# Altium PCB Car_Circuitry.PcbDoc
Units mm, origin at the board's own origin, x right, y up, seen from the top; angles counter-clockwise.
Board outline 92.11 x 67.11 mm, 4 copper layers (Top Layer, PWR Plane, GND Plane, Bottom Layer), stack 1.58 mm thick; 31 components, 29 nets, 123 pads, 23 vias.
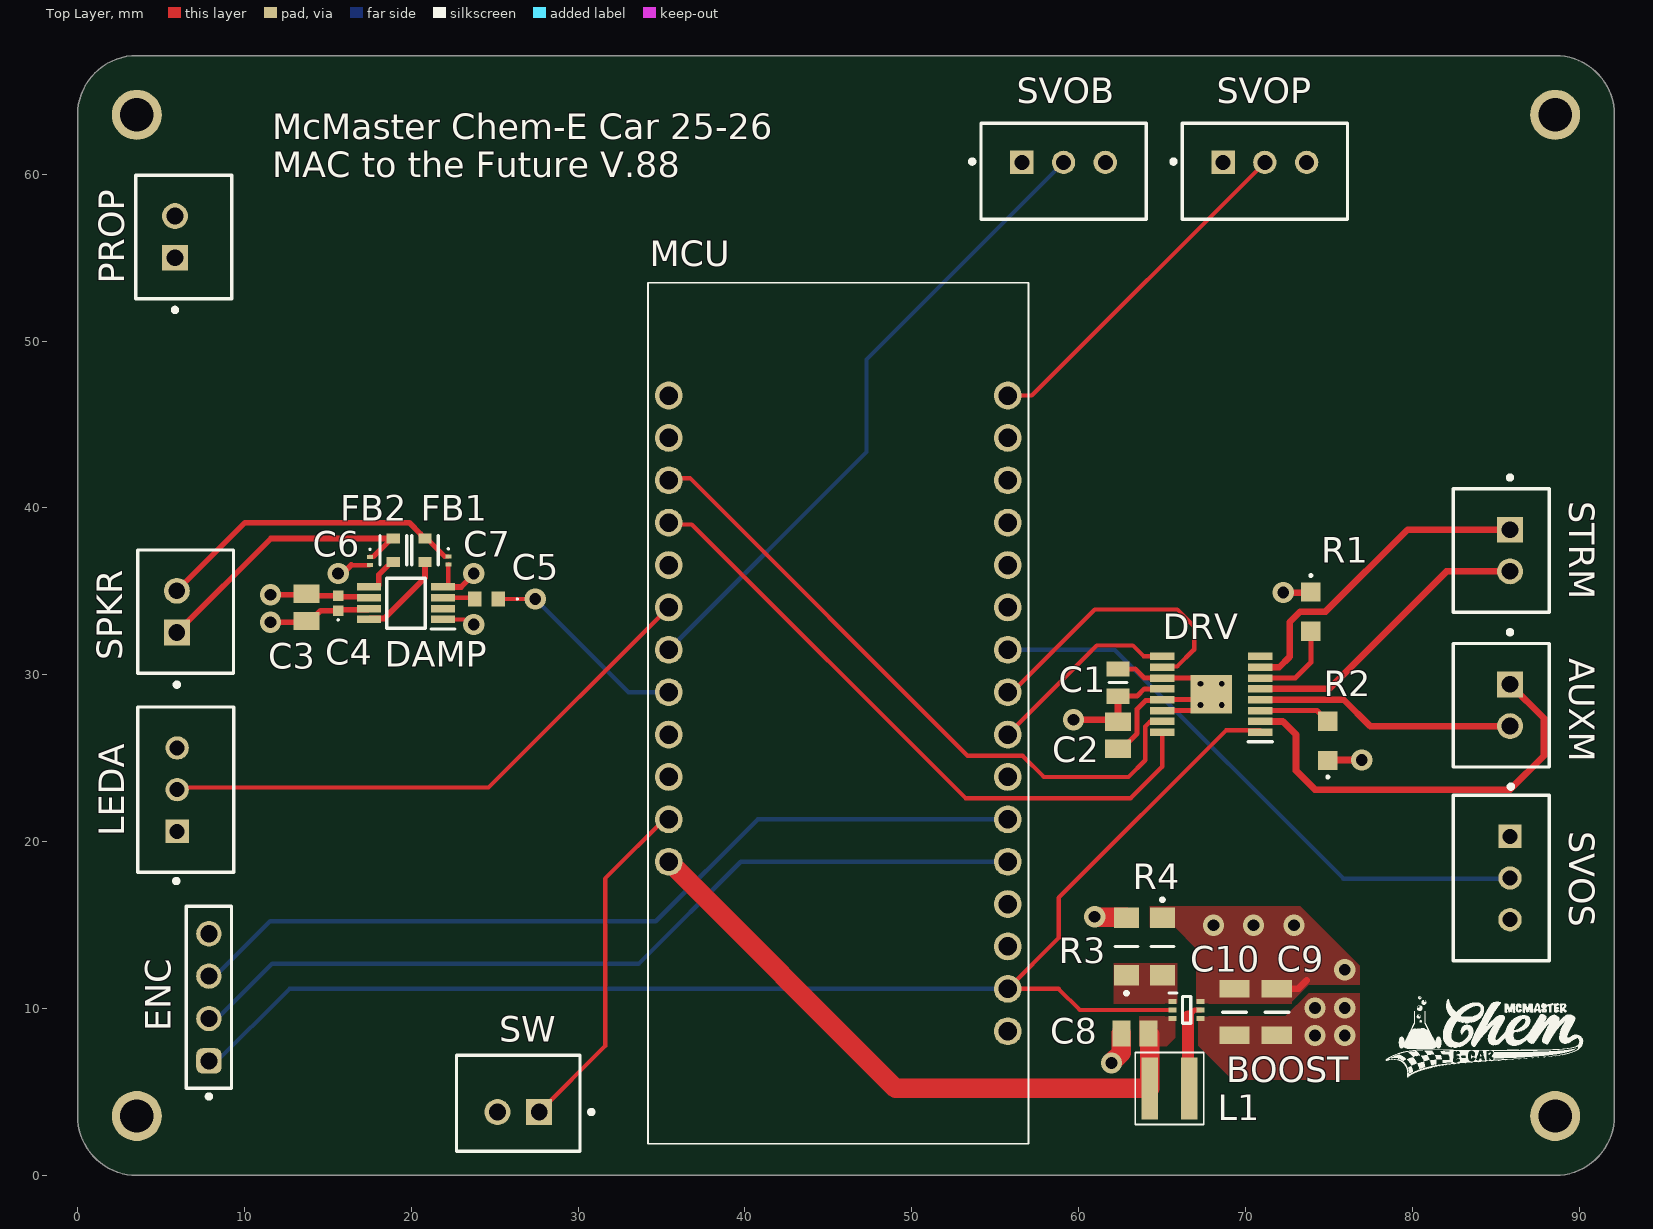
[diagram p0: Top Layer view]
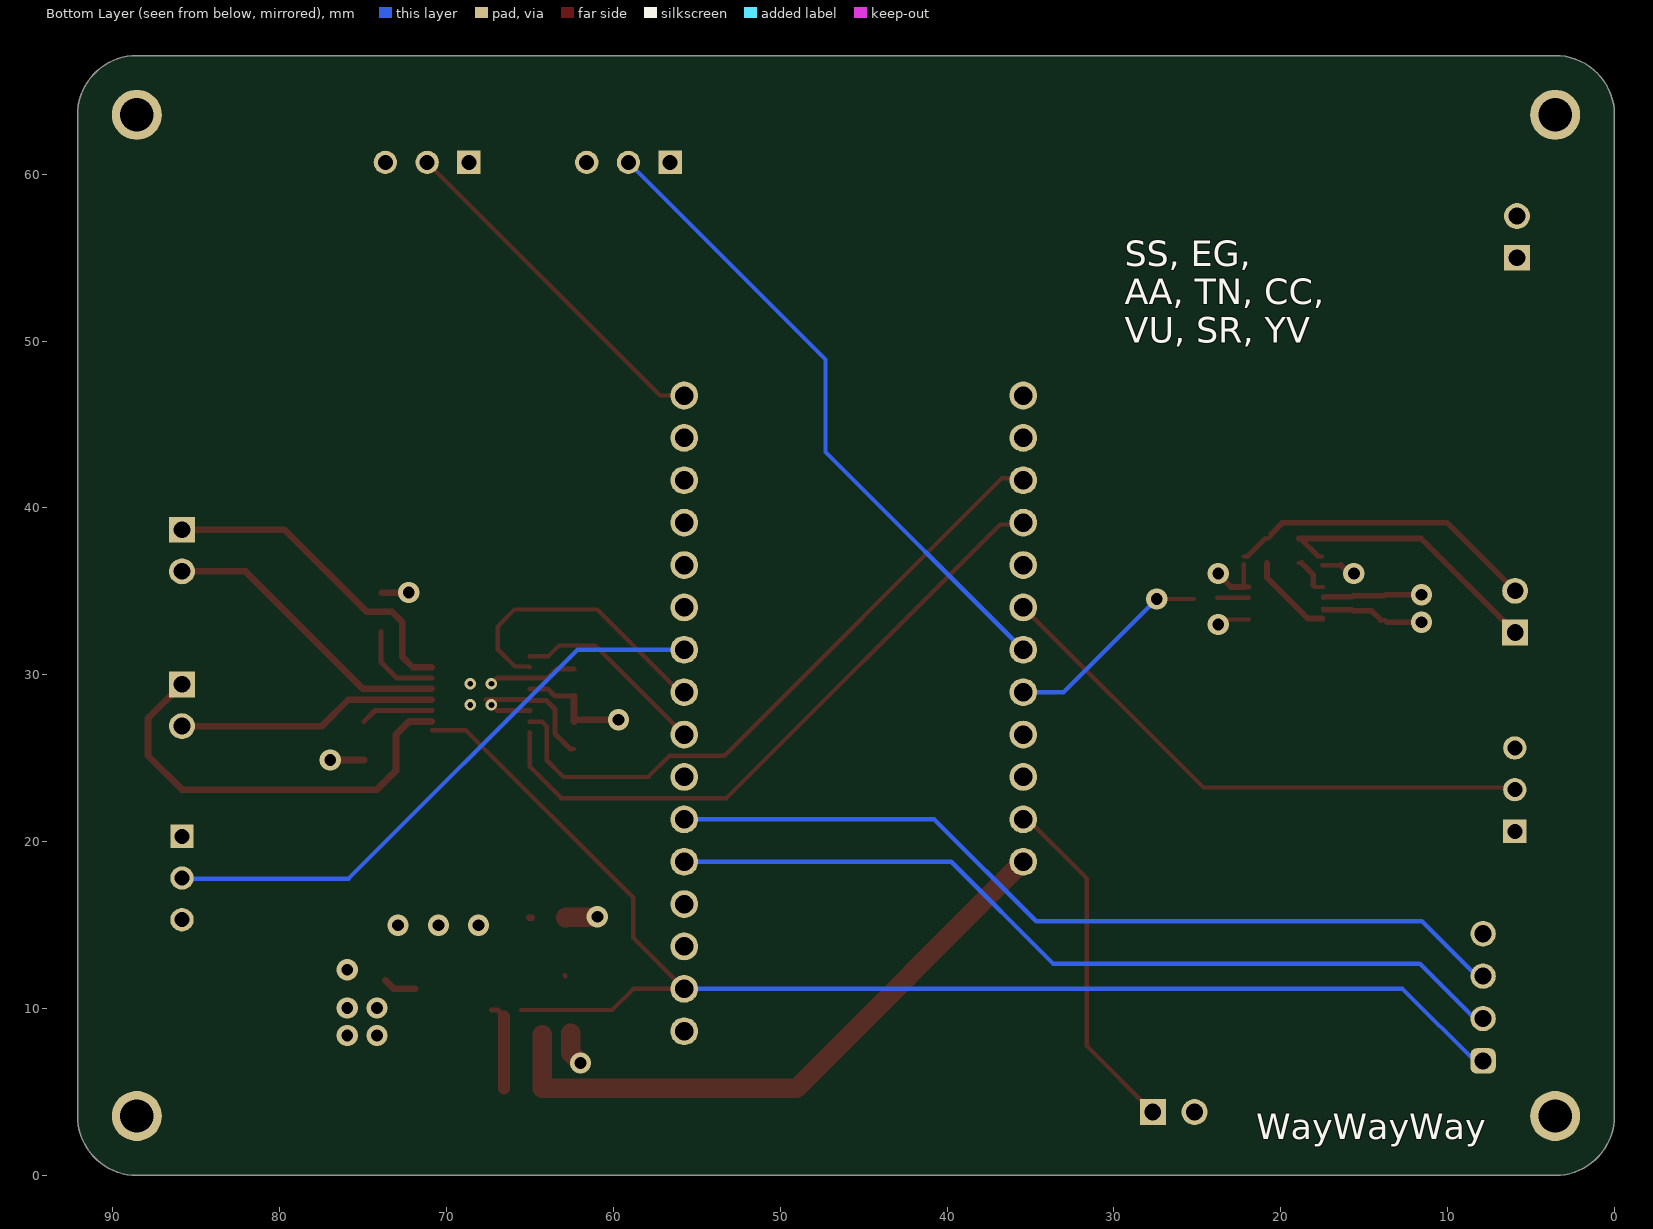
[diagram p1: Bottom Layer view, seen from below]
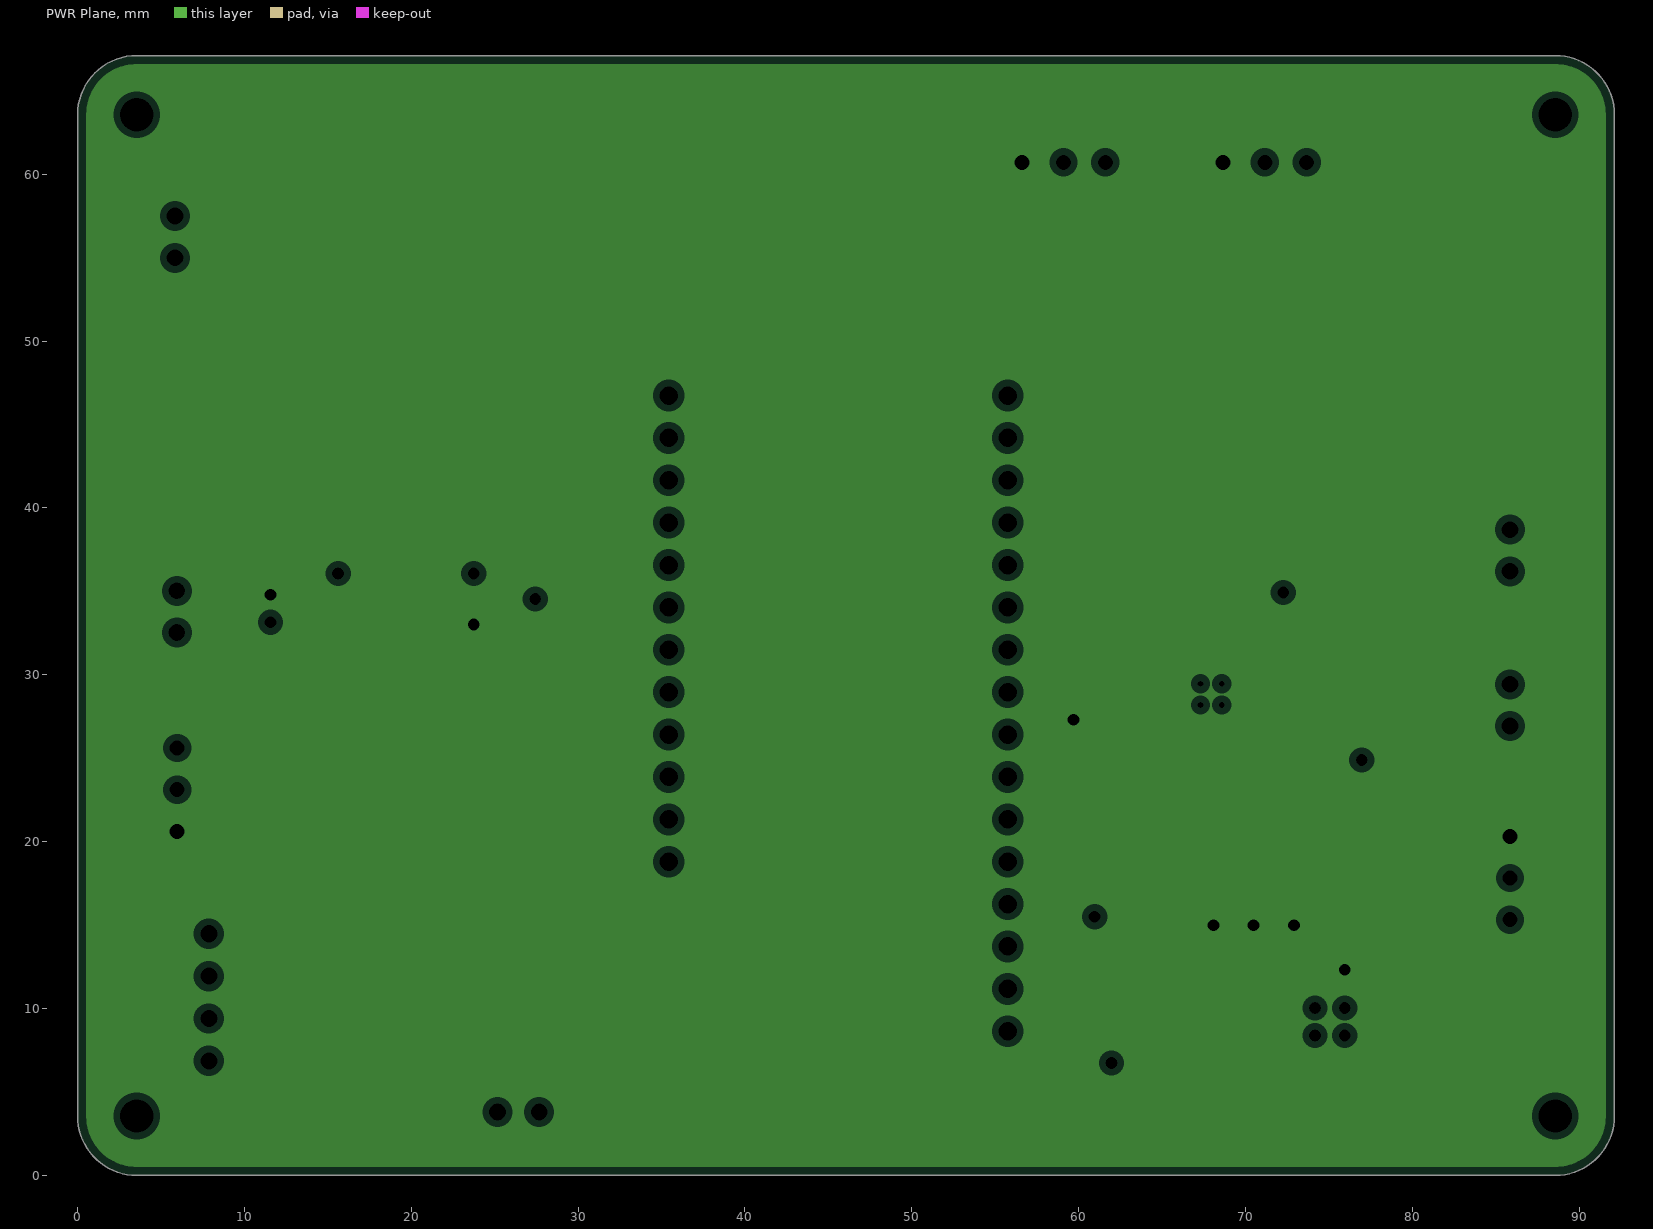
[diagram p2: PWR Plane, clearances drawn from the general rule]
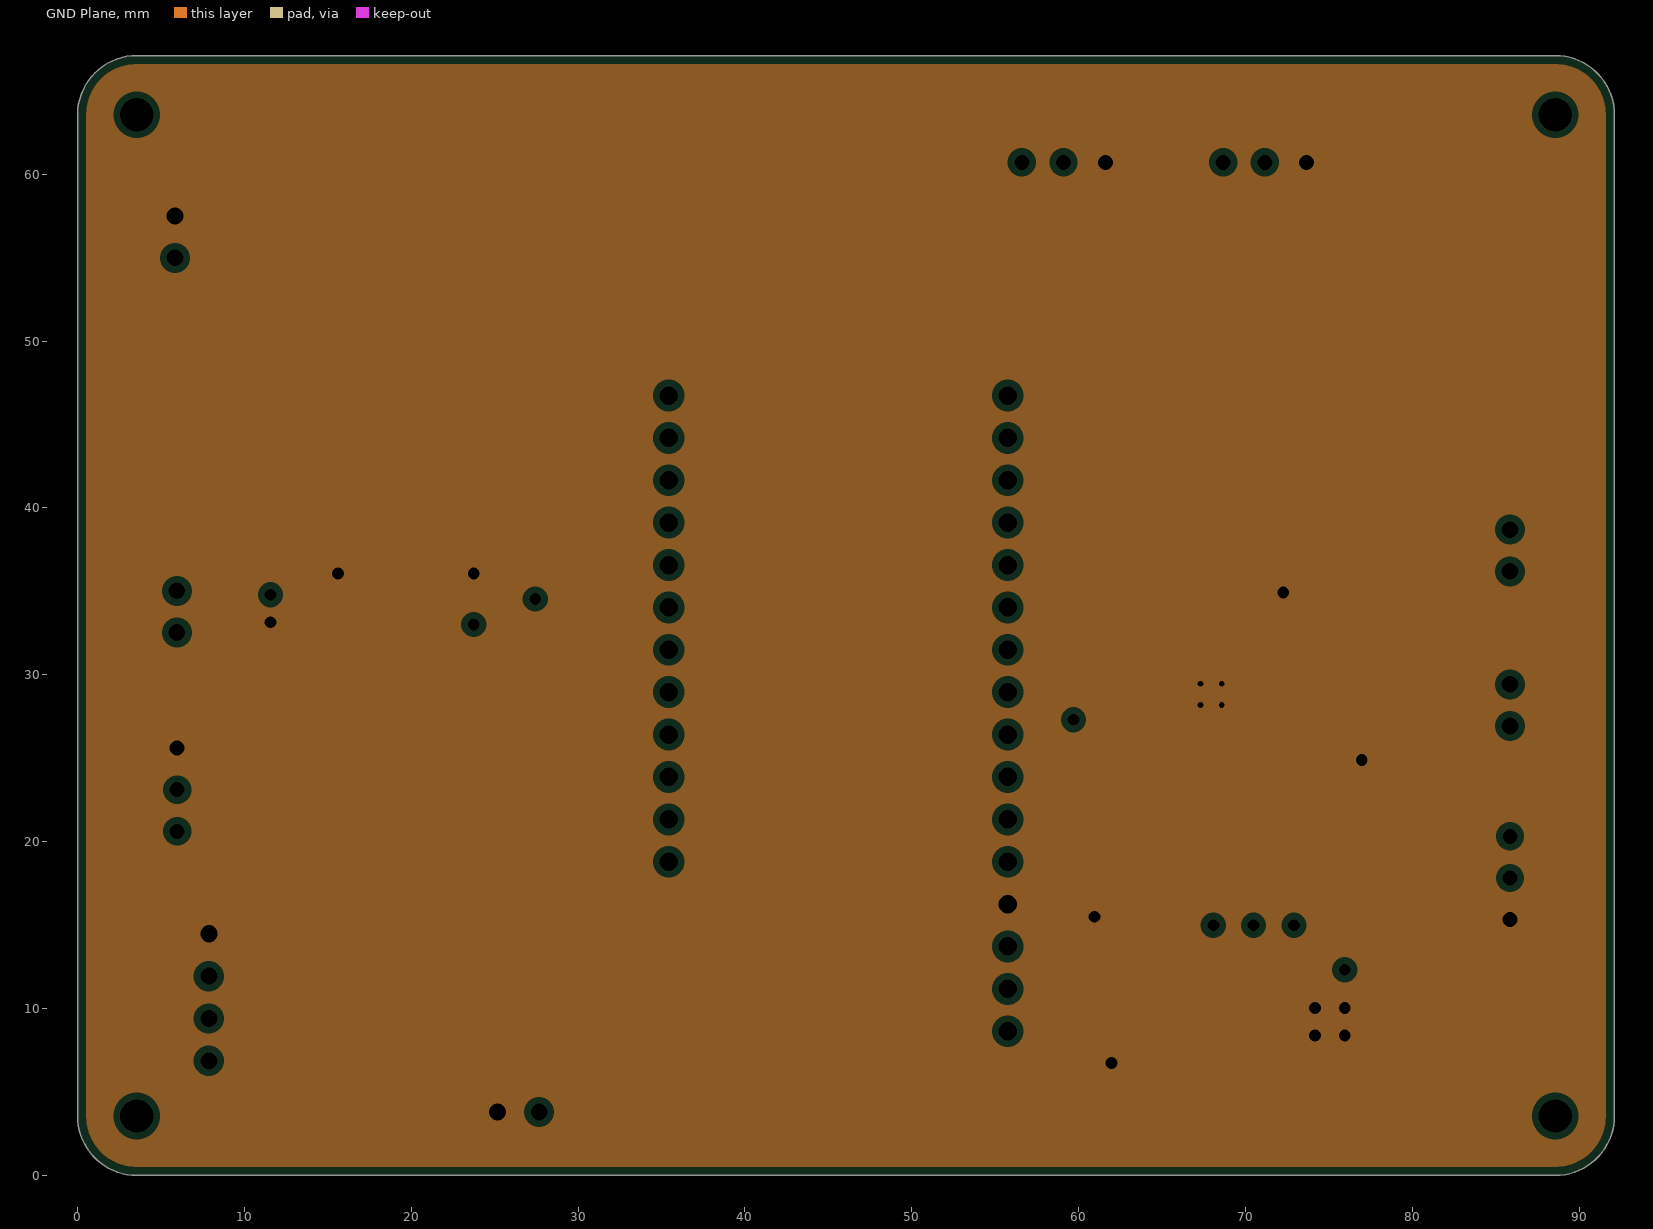
[diagram p3: GND Plane, clearances drawn from the general rule]
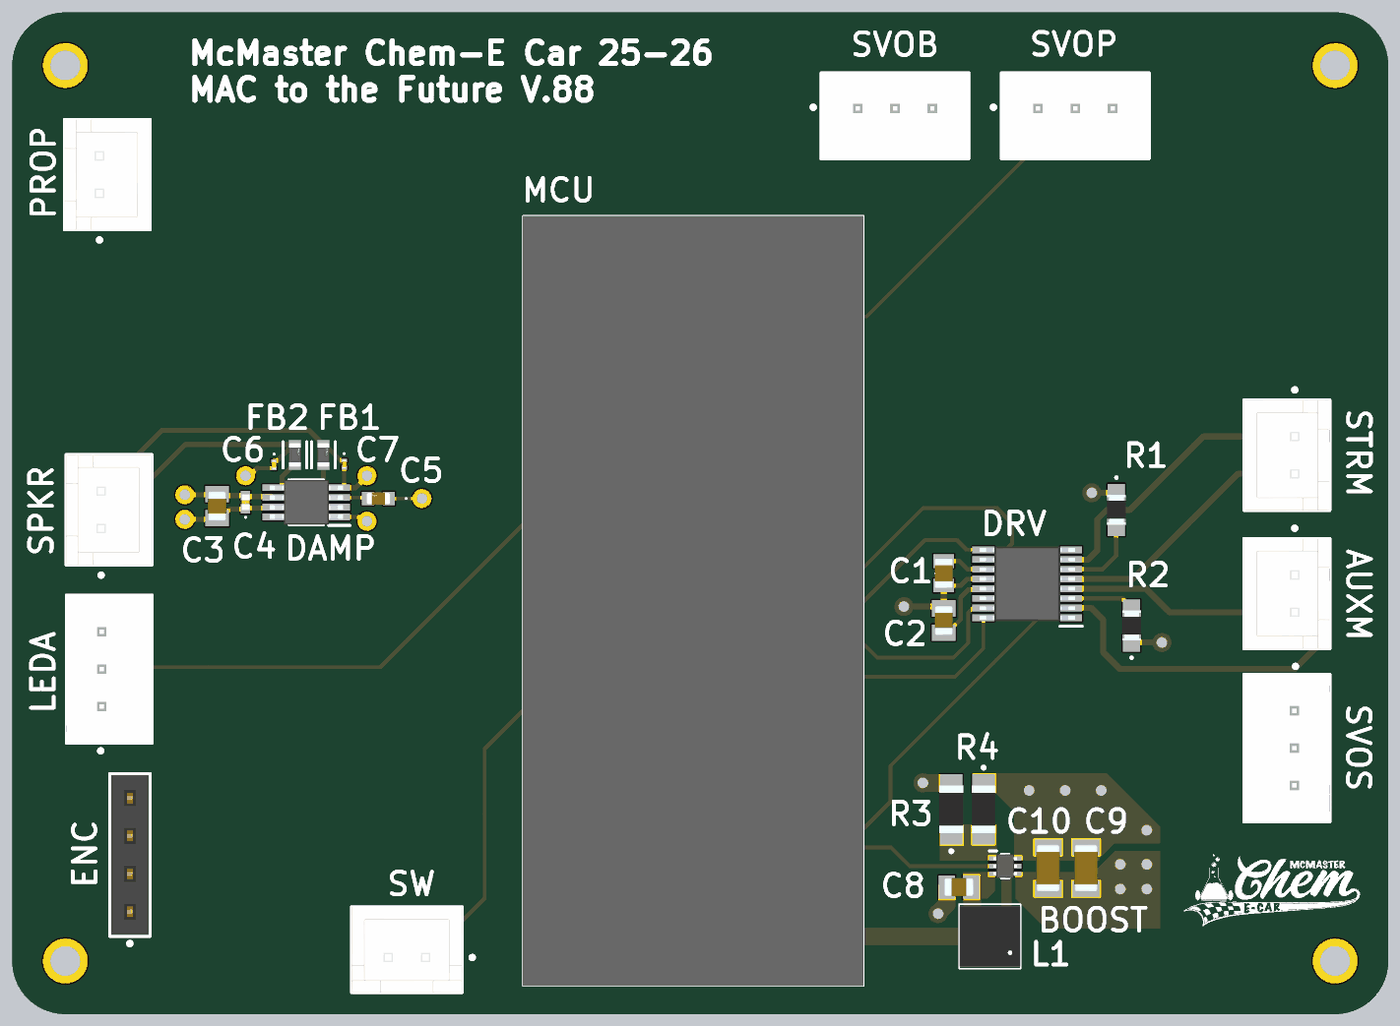
[diagram p4: 3D render of the assembled board from above, using the file's embedded part models]

## Layer stack, top to bottom
Top Solder: solder mask 0.0102, Solder Resist, Dk 3.5
Top Layer: signal copper 0.0356
Dielectric 2: prepreg 0.254, PP-006, Dk 4.1
PWR Plane: plane copper 0.035, net NetBOOST_6
Dielectric 1: dielectric 0.9306, FR-4, Dk 4.8
GND Plane: plane copper 0.035, net GND
Dielectric 3: prepreg 0.254, PP-006, Dk 4.1
Bottom Layer: signal copper 0.0356
Bottom Solder: solder mask 0.0102, Solder Resist, Dk 3.5

## Board outline
3.556,0 cw(c3.556,3.556) 0,3.556 0,63.556 cw(c3.556,63.556) 3.556,67.112 88.556,67.112 cw(c88.556,63.556) 92.112,63.556 92.112,3.556 cw(c88.556,3.556) 88.556,0

## Design rules (kind name [scope] priority, off if disabled: settings)
Clearance [All] p1: gap=0.254 ignorepadtopadclearanceinfootprint=TRUE except(0: Arc-Hole Track-Hole SMDPad-Hole THPad-Hole Via-Hole Fill-Hole Poly-Hole Region-Hole Text-Hole; 0.152: Arc-Arc Arc-Track Arc-SMDPad Track-Track Track-SMDPad; 0.25: Arc-Fill Arc-Poly Arc-Region Track-Fill Track-Poly Track-Region SMDPad-SMDPad SMDPad-THPad SMDPad-Fill SMDPad-Poly SMDPad-Region Fill-Fill Fill-Poly Fill-Region Poly-Poly Poly-Region Region-Region)
HoleSize [All] p1: absolutevalues=TRUE maxlimit=5 minlimit=0.025 maxpercent=80.000 minpercent=20.000
MinimumSolderMaskSliver [All] p1: minsoldermaskwidth=0.007
PlaneClearance [All] p1: clearance=0.4
PlaneConnect [All] p1: pad.planeconnectstyle=Relief pad.reliefexpansion=0.508 pad.reliefentries=4 pad.reliefconductorwidth=0.254 pad.reliefairgap=0.254 via.planeconnectstyle=Direct via.reliefexpansion=0.508 via.reliefentries=4 via.reliefconductorwidth=0.254 via.reliefairgap=0.254
PolygonConnect [All] p1: thpad.connectstyle=Relief thpad.reliefconductorwidth=0.254 thpad.reliefentries=4 thpad.polygonreliefangle="90 Angle" thpad.airgapwidth=0.254 smdpad.connectstyle=Direct smdpad.reliefconductorwidth=0.254 smdpad.reliefentries=4 smdpad.polygonreliefangle="90 Angle" smdpad.airgapwidth=0.254 via.connectstyle=Direct via.reliefconductorwidth=0.254 via.reliefentries=4 via.polygonreliefangle="90 Angle" via.airgapwidth=0.254
RoutingVias [All] p1: holewidth=0.711 width=1.27 viastyle="Through Hole" minholewidth=0.35 minwidth=0.7 maxholewidth=0.711 maxwidth=1.27
SilkToSilkClearance [All] p1: silktosilkclearance=0.152
SilkToSolderMaskClearance [IsPad] p1: minsilkscreentomaskgap=0.14 clearancetoexposedcopper=TRUE
SolderMaskExpansion [All] p1: expansion=0.102 istentingtop=FALSE
SupplyNets "Schematic Supply Nets" [InNet('GND')] p1: voltage=0.000
Width [All] p1: maxlimit=2 minlimit=0.152 preferedwidth=0.254
24 further rules are at their usual default settings.

## Components (designator, comment, footprint, x,y, rotation, side; value= is the part's Value field where it differs from the comment)
AUXM "B2B-XH-A(LF)(SN)" FP-B2B-XH-A_LF_SN-MFG 85.327,28.174 r270 top
BOOST "TPS61023DRLT" SOTFL50P160X60-6N 66.472,9.914 r0 top
C1 "100 nF" CAPC2012X95N 62.357,29.533 r270 top
C2 "10 μF" CAPC2012X140N 62.357,26.368 r270 top
C3 "10 μF" CAPC2012X140N 13.716,34.036 r90 top
C4 "1 μF" C0402C104J4RACTU 15.621,34.29 r90 top
C5 "0.27 μF" GCM188 24.511,34.544 r180 top
C6 "220 pF" GRM033D70J224ME01D 17.526,36.813 r270 top
C7 "220 pF" GRM033D70J224ME01D 22.225,36.847 r270 top
C8 "10 μF" CAPC2012X140N 63.373,8.509 r0 top
C9 "22 μF" CAPC3216X180N 71.882,9.779 r90 top
C10 "22 μF" CAPC3216X180N 69.342,9.779 r90 top
DAMP "PAM8302AASCR" SOP65P490X110-8N 19.685,34.29 r180 top
DRV "DRV8847PWPR" SOP65P640X120-17N 67.945,28.829 r180 top
ENC "61300411821" 61300411821 7.874,10.668 r90 top
FB1 "Ferrite" FP-MPZ1608-0_8-MFG 20.828,37.465 r90 top
FB2 "Ferrite" FP-MPZ1608-0_8-MFG 18.923,37.465 r90 top
L1 "1 μH" 74438357010 65.447,5.207 r180 top
LEDA "B3B-XH-A(LF)(SN)" FP-B3B-XH-A_LF_SN-MFG 6.494,23.114 r90 top
MCU "Feather RP2040 Adalogger" 2796 55.753,8.636 r90 top
PROP "B2B-XH-A(LF)(SN)" FP-B2B-XH-A_LF_SN-MFG 6.367,56.241 r90 top
R1 "680 mΩ" ERJ6_B_BW_R_LW_CW_D 73.914,33.782 r270 top
R2 "680 mΩ" ERJ6_B_BW_R_LW_CW_D 74.93,26.035 r90 top
R3 "100 kΩ" ERJ8ENF1000V 62.865,13.716 r90 top
R4 "732 kΩ" ERJ8ENF1000V 65.024,13.716 r270 top
SPKR "SW400204-1" FP-B2B-XH-A_LF_SN-MFG 6.477,33.782 r90 top
STRM "B2B-XH-A(LF)(SN)" FP-B2B-XH-A_LF_SN-MFG 85.327,37.445 r270 top
SVOB "B3B-XH-A(LF)(SN)" FP-B3B-XH-A_LF_SN-MFG 59.095,60.181 r0 top
SVOP "B3B-XH-A(LF)(SN)" FP-B3B-XH-A_LF_SN-MFG 71.16,60.181 r0 top
SVOS "B3B-XH-A(LF)(SN)" FP-B3B-XH-A_LF_SN-MFG 85.327,17.82 r270 top
SW "B2B-XH-A(LF)(SN)" FP-B2B-XH-A_LF_SN-MFG 26.416,4.318 r180 top

## Footprints (in the part's own frame and the unit in brackets; to place one, negate y for a bottom-side part, rotate by r counter-clockwise, add the part's x,y. Pads: shape width x height; smd on the part's side, far side on the other; paste and mask are expansions set on the pad)
2796 [mm]
  round 1.665 hole 1.11: 1(10.16,20.32) 2(12.7,20.32) 3(15.24,20.32) 4(17.78,20.32) 5(20.32,20.32) 6(22.86,20.32) 7(25.4,20.32) 8(27.94,20.32) 9(30.48,20.32) 10(33.02,20.32) 11(35.56,20.32) 12(38.1,20.32) 13(38.1,0) 14(35.56,0) 15(33.02,0) 16(30.48,0) 17(27.94,0) 18(25.4,0) 19(22.86,0) 20(20.32,0) 21(17.78,0) 22(15.24,0) 23(12.7,0) 24(10.16,0) 25(7.62,0) 26(5.08,0) 27(2.54,0) 28(0,0)
  silkscreen extent -6.75,-1.24 44.85,21.56, body extent -6.75,-1.24 44.85,21.56, height 8.1
61300411821 [mm] "Socket Header, Pitch 2.54 mm, THT, Vertical, single row, 4p"
  rrect50% 1.52x1.52 hole 1.02: 1(-3.81,0)
  round 1.52 hole 1.02: 2(-1.27,0) 3(1.27,0) 4(3.81,0)
  silkscreen extent -6.06,-1.35 5.46,1.35, body extent -5.33,-1.25 5.33,1.25, height 8.55
74438357010 [mm]
  rect 0.98x3.7 smd: 1(-1.185,0) 2(1.185,0)
  silkscreen extent -2.05,-2.16 2.05,2.16, body extent -2.05,-2.05 2.05,2.05, height 3.1
C0402C104J4RACTU [mm]
  rect 0.62x0.62 smd: 1(-0.45,0) 2(0.45,0)
  silkscreen extent -1.05,-0.05 -0.95,0.05, body extent -0.52,-0.28 0.53,0.27, height 0.55
CAPC2012X95N [mm]
  rect 0.91x1.39 smd: 1(-0.82,0) 2(0.82,0)
  silkscreen extent 0,-0.53 0,0.53, body extent -1,-0.63 1,0.63, height 0.95
CAPC2012X140N [mm]
  rect 1.1x1.57 smd: 1(-0.81,0) 2(0.81,0)
  body extent -1,-0.63 1,0.63, height 1.4
CAPC3216X180N [mm]
  rect 1.05x1.82 smd: 1(-1.39,0) 2(1.39,0)
  silkscreen extent 0,-0.7 0,0.7, body extent -1.6,-0.8 1.6,0.8, height 1.8
ERJ6_B_BW_R_LW_CW_D [mm]
  rect 1.15x1.15 smd: 1(-1.175,0) 2(1.175,0)
  silkscreen extent -2.21,-0.05 -2.11,0.05, body extent -1,-0.63 1,0.63, height 0.6
ERJ8ENF1000V [mm]
  rect 1.25x1.5 smd: 1(-1.725,0) 2(1.725,0)
  silkscreen extent -2.9,-0.67 0,0.67, body extent -1.6,-0.8 1.6,0.8, height 0.6
FP-B2B-XH-A_LF_SN-MFG [mm]
  rect 1.55x1.55 hole 1 paste-2539.97 mask+0: 1(-1.25,0.525)
  round 1.55 hole 1 paste-2539.97 mask+0: 2(1.25,0.525)
  silkscreen extent -4.5,-2.87 3.7,2.88, body extent -3.8,-2.98 3.8,2.98, height 0.25
FP-B3B-XH-A_LF_SN-MFG [mm]
  rect 1.4x1.4 hole 0.9 paste-2539.97 mask+0: 1(-2.5,0.525)
  round 1.4 hole 0.9 paste-2539.97 mask+0: 2(0,0.525) 3(2.5,0.525)
  silkscreen extent -5.6,-2.88 4.95,2.88, body extent -5.05,-2.98 5.05,2.98, height 0.25
FP-MPZ1608-0_8-MFG [mm]
  rect 0.6x0.8 smd paste+0 mask+0: 1(-0.7,0) 2(0.7,0)
  silkscreen extent -0.87,-0.8 0.87,0.8, body extent -1.1,-0.58 1.1,0.58, height 0.25
GCM188 [mm]
  rect 0.8x0.9 smd: 1(-0.7,0) 2(0.7,0)
  silkscreen extent -1.9,-0.05 -1.8,0.05, body extent -0.8,-0.4 0.8,0.4, height 0.9
GRM033D70J224ME01D [mm]
  rect 0.25x0.35 smd: 1(-0.237,0) 2(0.237,0)
  silkscreen extent -0.75,-0.05 -0.65,0.05, body extent -0.3,-0.15 0.3,0.15, height 0.3
SOP65P490X110-8N [mm]
  rect 1.425x0.45 smd: 1(-2.212,0.975) 2(-2.212,0.325) 3(-2.212,-0.325) 4(-2.212,-0.975) 5(2.212,-0.975) 6(2.212,-0.325) 7(2.212,0.325) 8(2.212,0.975)
  silkscreen extent -2.93,-1.5 1.15,1.55, body extent -2.45,-1.5 2.45,1.5, height 1.1
SOP65P640X120-17N [mm]
  rect 1.475x0.45 smd: 1(-2.938,2.275) 2(-2.938,1.625) 3(-2.938,0.975) 4(-2.938,0.325) 5(-2.938,-0.325) 6(-2.938,-0.975) 7(-2.938,-1.625) 8(-2.938,-2.275) 9(2.938,-2.275) 10(2.938,-1.625) 11(2.938,-0.975) 12(2.938,-0.325) 13(2.938,0.325) 14(2.938,0.975) 15(2.938,1.625) 16(2.938,2.275)
  rect 2.46x2.31 smd: 17(0,0)
  silkscreen extent -3.67,2.85 -2.2,2.85, body extent -3.2,-2.5 3.2,2.5, height 1.2
SOTFL50P160X60-6N [mm]
  rect 0.475x0.3 smd: 1(-0.838,0.5) 2(-0.838,0) 3(-0.838,-0.5) 4(0.838,-0.5) 5(0.838,0) 6(0.838,0.5)
  silkscreen extent -1.06,-0.8 0.25,1.02, body extent -0.8,-0.8 0.8,0.8, height 0.6

## Part data
AUXM PROP SPKR STRM SW: library part CMP-2000-05888-3, "CONN HEADER VERT 2POS 2.5MM", Color=Natural, Contact Resistance=20mR, Current Rating=3A, Housing Color=White, Insulation Resistance=1GR, Max Operating Temperature=85°C, Max Voltage Rating (AC)=250V, Min Operating Temperature=-25°C, Connector Type="Male Pin", Contact Material=Brass, Contact Plating=Tin, Contact Type="Male Pin", Depth=5.75mm, Fastening Type=Detent, Housing Material=Polyamide, Lead Free="Lead Free", Lead Pitch=2.5mm, Length=7.4mm, Max Current Rating=3A, Max Voltage Rating (DC)=250V, Mount="Through Hole", Number of Contacts=2, Number of Positions=2, Number of Rows=1, Orientation=Straight, Packaging=Bulk, Pitch=2.5mm, REACH SVHC="No SVHC", Series=XH, Termination=Solder, Voltage Rating=250V, Voltage Rating (AC)=250V, Wire/Cable Gauge=22AWG
BOOST: "Integrated Circuit", Manufacturer_Name="Texas Instruments", Mouser Part Number=595-TPS61023DRLT, Arrow Part Number=TPS61023DRLT, Arrow Price/Stock=https://www.arrow.com/en/products/tps61023drlt/texas-instruments?region=nac, Datasheet Link=http://www.ti.com/general/docs/suppproductinfo.tsp?distId=10&gotoUrl=http%3A%2F%2Fwww.ti.com%2Flit%2Fgpn%2Ftps61023, Height=0.6mm, Manufacturer_Part_Number=TPS61023DRLT, Mouser Price/Stock=https://www.mouser.co.uk/ProductDetail/Texas-Instruments/TPS61023DRLT?qs=BJlw7L4Cy78Zr3IJIU3gNw%3D%3D
C1: library part CL21B104KBCNNNC, "Capacitor", Manufacturer_Name=SAMSUNG, Mouser Part Number=187-CL21B104KBCNNNC, Arrow Part Number=CL21B104KBCNNNC, Arrow Price/Stock=https://www.arrow.com/en/products/cl21b104kbcnnnc/samsung-electro-mechanics?region=europe, Datasheet Link=https://datasheet.datasheetarchive.com/originals/distributors/Datasheets_SAMA/86a3eaf0882763ef32124d5901f9b833.pdf, Height=0.95mm, Manufacturer_Part_Number=CL21B104KBCNNNC, Mouser Price/Stock=https://www.mouser.co.uk/ProductDetail/Samsung-Electro-Mechanics/CL21B104KBCNNNC?qs=349EhDEZ59pEfpnm5yBEmQ%3D%3D
C2 C3 C8: library part CL21B106KOQNNNE, "Capacitor", Manufacturer_Name=SAMSUNG, Mouser Part Number=187-CL21B106KOQNNNE, Arrow Part Number=CL21B106KOQNNNE, Arrow Price/Stock=https://www.arrow.com/en/products/cl21b106koqnnne/samsung-electro-mechanics, Datasheet Link=https://datasheet.datasheetarchive.com/originals/distributors/Datasheets_SAMA/a6a503886ec2e900bbf4e5d6e2f8e8b0.pdf, Height=1.4mm, Manufacturer_Part_Number=CL21B106KOQNNNE, Mouser Price/Stock=https://www.mouser.co.uk/ProductDetail/Samsung-Electro-Mechanics/CL21B106KOQNNNE?qs=349EhDEZ59r8qgLddyW2Yw%3D%3D
C4: library part C0402C105K9PACTU, "Capacitor", Manufacturer_Name=KEMET, Mouser Part Number=80-C0402C105K9P, Arrow Part Number=C0402C105K9PACTU, Arrow Price/Stock=https://www.arrow.com/en/products/c0402c105k9pactu/kemet-corporation?region=nac, Datasheet Link=https://content.kemet.com/datasheets/KEM_C1002_X7R_SMD.pdf, Height=0.55mm, Manufacturer_Part_Number=C0402C105K9PACTU, Mouser Price/Stock=https://www.mouser.co.uk/ProductDetail/KEMET/C0402C105K9PACTU?qs=UdQET6xYxVCMExqTDkuPeQ%3D%3D
C5: library part GCM188R71C274KA37D, "Capacitor", Manufacturer_Name="Murata Electronics", Mouser Part Number=81-GCM188R71C274KA7D, Arrow Part Number=GCM188R71C274KA37D, Arrow Price/Stock=https://www.arrow.com/en/products/gcm188r71c274ka37d/murata-manufacturing?region=nac, Datasheet Link=https://search.murata.co.jp/Ceramy/image/img/A01X/G101/ENG/GCM188R71C274KA37-01A.pdf, Height=0.9mm, Manufacturer_Part_Number=GCM188R71C274KA37D, Mouser Price/Stock=https://www.mouser.co.uk/ProductDetail/Murata-Electronics/GCM188R71C274KA37D?qs=ui%252B2d9lVEI6LbBgpTRCetQ%3D%3D
C6 C7: library part GRM033R71C221KA01D, "Capacitor", Manufacturer_Name="Murata Electronics", Mouser Part Number=81-GRM033R71C221KA1D, Datasheet Link=https://search.murata.co.jp/Ceramy/image/img/A01X/G101/ENG/GRM033R71C221KA01-01A.pdf, Height=0.33mm, Manufacturer_Part_Number=GRM033R71C221KA01D, Mouser Price/Stock=https://www.mouser.com/Search/Refine.aspx?Keyword=81-GRM033R71C221KA1D
C9 C10: library part CL31B226KPHNNNE, "Capacitor", Manufacturer_Name=SAMSUNG, Mouser Part Number=187-CL31B226KPHNNNE, Arrow Part Number=CL31B226KPHNNNE, Arrow Price/Stock=https://www.arrow.com/en/products/cl31b226kphnnne/samsung-electro-mechanics?region=nac, Datasheet Link=https://media.digikey.com/pdf/Data%20Sheets/Samsung%20PDFs/CL_Series_MLCC_ds.pdf, Height=1.8mm, Manufacturer_Part_Number=CL31B226KPHNNNE, Mouser Price/Stock=https://www.mouser.co.uk/ProductDetail/Samsung-Electro-Mechanics/CL31B226KPHNNNE?qs=EHbfJsBkB6nWZLDFWYPW4w%3D%3D
DAMP: "Integrated Circuit", Manufacturer_Name="Diodes Incorporated", Mouser Part Number=621-PAM8302AASCR, Arrow Part Number=PAM8302AASCR, Arrow Price/Stock=https://www.arrow.com/en/products/pam8302aascr/diodes-incorporated?utm_currency=USD&region=nac, Datasheet Link=https://www.diodes.com/assets/Datasheets/PAM8302A.pdf, Height=1.1mm, Manufacturer_Part_Number=PAM8302AASCR, Mouser Price/Stock=https://www.mouser.co.uk/ProductDetail/Diodes-Incorporated/PAM8302AASCR?qs=pYVYkI7xuRXTVZEQSGcDyg%3D%3D
DRV: "Integrated Circuit", Manufacturer_Name="Texas Instruments", Mouser Part Number=595-DRV8847PWPR, Arrow Part Number=DRV8847PWPR, Arrow Price/Stock=https://www.arrow.com/en/products/drv8847pwpr/texas-instruments, Datasheet Link=http://www.ti.com/general/docs/lit/getliterature.tsp?genericPartNumber=DRV8847&fileType=pdf&HQS=ti-null-null-sf-df-pf-sep-wwe&DCM=yes, Height=1.2mm, Manufacturer_Part_Number=DRV8847PWPR, Mouser Price/Stock=https://www.mouser.co.uk/ProductDetail/Texas-Instruments/DRV8847PWPR?qs=w%2Fv1CP2dgqrvdo8J8mfnIQ%3D%3D
ENC: library part CMP-1502-01316-4, "THT Vertical Socket Header WR-PHD, Pitch 2.54 mm, Single Row, 4 pins", Contact Resistance=20mΩ, Current Rating=3A, Operating Supply Voltage=250V, Gender=Female, Lead Pitch=2.54mm, Number of Pins=4, Orientation=Vertical
FB1 FB2: library part CMP-08257-000028-1, "Power line Ferrite Bead 220Ω @ 100MHz 2.2A DCR 0.05Ω SMD 0603", Case Code (Imperial)=0603, Case Code (Metric)=1608, Current Rating=2.2A, DC Resistance (DCR)=50mR, Package Quantity=1, Tolerance=25%, Case/Package=0603, Core Material=Ferrite, Height=0.037inch, Impedance=220R, Lead Free="Lead Free", Length=0.063inch, Max DC Current=2.2A, Mount="Surface Mount", Number of Pins=2, Packaging="Cut Tape", REACH SVHC="No SVHC", RoHS Compliant=Yes, Series=MPZ, Width=0.031inch
L1: library part 74438357010, "Inductor", Manufacturer_Name="Wurth Elektronik", Mouser Part Number=710-74438357010, Datasheet Link=https://katalog.we-online.de/pbs/datasheet/74438357010.pdf, Height=3.1mm, Manufacturer_Part_Number=74438357010, Mouser Price/Stock=https://www.mouser.co.uk/ProductDetail/Wurth-Elektronik/74438357010?qs=AQlKX63v8RstGPuQmrueWg%3D%3D
LEDA SVOB SVOP SVOS: library part CMP-17439-000014-3, "CONN HEADER VERT 3POS 2.5MM", Color=Natural, Contact Resistance=20mR, Current Rating=3A, Flammability Rating="UL94 V-0", Housing Color=White, Insulation Resistance=1GR, Max Operating Temperature=85°C, Max Voltage Rating (AC)=250V, Min Operating Temperature=-25°C, Connector Type=Header, Contact Finish - Mating=TIN, Contact Material=Brass, Contact Plating=Tin, Contact Shape=Square, Contact Type="Male Pin", Depth=5.75mm, Fastening Type=Detent, Gender=Male, Housing Material=Polyamide, Insulation Color=Natural, Insulation Material=Nylon, Lead Free="Lead Free", Lead Pitch=2.5mm, Length=9.9mm, Max Current Rating=3A, Max Voltage Rating (DC)=250V, Mount="Through Hole", Number of Contacts=3, Number of Positions=3, Number of Rows=1, Orientation=Straight, Packaging=Bulk, Pitch=2.5mm, REACH SVHC="No SVHC", Series=XH, Termination=Solder, Voltage Rating=250V, Voltage Rating (AC)=250V, Wire/Cable Gauge=22AWG
MCU: library part 2796, "Adafruit Microcontroller", Arrow Part Number=4884, Manufacturer_Name=Adafruit, Mouser Part Number=485-5980, Arrow Price/Stock=https://www.arrow.com/en/products/4884/adafruit-industries, Datasheet Link=https://learn.adafruit.com/adafruit-feather-rp2040-adalogger/, Height=8mm, Manufacturer_Part_Number=4884, Mouser Price/Stock=https://www.mouser.com/ProductDetail/Adafruit/5980?qs=IKkN%2F947nfCnlS5PgbpnkA%3D%3D
R1 R2: library part ERJ-6DQJR68V, "Resistor", Manufacturer_Name=Panasonic, Arrow Part Number=ERJ-6DQJR68V, Arrow Price/Stock=https://www.arrow.com/en/products/erj-6dqjr68v/panasonic, Datasheet Link=http://industrial.panasonic.com/cdbs/www-data/pdf/RDN0000/AOA0000C313.pdf, Manufacturer_Part_Number=ERJ-6DQJR68V
R3: library part ERJ-8ENF1003V, "Resistor", Manufacturer_Name=Panasonic, Mouser Part Number=667-ERJ-8ENF1003V, Arrow Part Number=ERJ-8ENF1003V, Arrow Price/Stock=https://www.arrow.com/en/products/erj-8enf1003v/panasonic?region=nac, Datasheet Link=https://industrial.panasonic.com/cdbs/www-data/pdf/RDA0000/AOA0000C86.pdf, Height=0.7mm, Manufacturer_Part_Number=ERJ-8ENF1003V, Mouser Price/Stock=https://www.mouser.co.uk/ProductDetail/Panasonic/ERJ-8ENF1003V?qs=8%252BG0TiN%2FgVoayg2hl%252BJeeg%3D%3D
R4: library part ERJ-8ENF7323V, "Resistor", Manufacturer_Name=Panasonic, Mouser Part Number=667-ERJ-8ENF7323V, Datasheet Link=https://industrial.panasonic.com/cdbs/www-data/pdf/RDA0000/AOA0000C86.pdf, Height=0.7mm, Manufacturer_Part_Number=ERJ-8ENF7323V, Mouser Price/Stock=https://www.mouser.co.uk/ProductDetail/Panasonic/ERJ-8ENF7323V?qs=Ow%252BOiPmaljHJ6lt%2FbxwsiQ%3D%3D

## Free pads (board coordinates)
  round 3 hole 2: 4(3.556,3.556) 4(3.556,63.556) 4(88.556,3.556) 4(88.556,63.556)

## Via types
v1: diameter 1.27, hole 0.711, Top Layer to Bottom Layer, tented both sides, 13 vias
v2: diameter 1.27, hole 0.711, Top Layer to Bottom Layer, 6 vias
v3: diameter 0.7, hole 0.35, Top Layer to Bottom Layer, 4 vias

## Nets (pads, with @x,y where several pads share a name; then routed paths per layer and width w, separated by ;. In a path a pad name is that pad's centre, name@x,y a point inside that pad or via, vN(x,y) a via of type N, cw(c..) or ccw(c..) an arc to the next point about the centre after c; other vN are vias at no path point)
GND: BOOST.4 C1.1 C2.2 C3.1 C4.1 C6.2 C7.2 C8.1 C9.1 C10.1 DAMP.4 DAMP.7 DRV.11 DRV.13 DRV.14 DRV.17 ENC.4 LEDA.3 MCU.25 PROP.2 R1.1 R2.1 R3.2 SVOB.3 SVOP.3 SVOS.3 SW.2 | length 34.2
  Top Layer w0.254: C3.1@13.637,33.147 C3.1 ; C3.1@13.716,33.274 C3.1@13.999,33.274 ; C4.1@15.621,33.782 C4.1@15.742,33.903 ; v2(15.621,36.068) v2@15.896,36.068 ; DAMP.7@17.411,33.903 DAMP.7 ; C2.2 C2.2@62.467,25.558 ; DRV.14 DRV.14@65.024,27.871 ; DRV.17@66.97,27.854 v3(67.31,28.194) ; R1.1@73.882,34.925 R1.1 ; v1@74.161,8.389 v1(74.168,8.382)
  Top Layer w0.27: 16.404,36.576 C6.2 ; DAMP.4@22.225,35.34 C7.2
  Top Layer w0.3: DAMP.4 22.15,35.265 DAMP.4@22.225,35.34 ; C1.1 63.383,30.353 63.932,29.804 DRV.11 DRV.17@66.97,29.804 ; C2.2@62.467,25.558 62.592,25.558 63.5,26.466 63.5,27.94 64.008,28.448 65.007,28.448 65.063,28.504 DRV.17@67.62,28.504 ; DRV.14@65.028,27.833 DRV.14 DRV.17@66.97,27.854
  Top Layer w0.34: v2(11.557,33.147) C3.1@13.637,33.147 ; C3.1@13.999,33.274 14.565,33.84 C4.1 ; C4.1@15.742,33.903 DAMP.7@17.411,33.903 ; v2@15.896,36.068 16.404,36.576 ; DAMP.4@22.225,35.265 22.991,35.265 23.749,36.023 v2(23.749,36.068)
  Top Layer w0.4: v1(72.263,34.925) R1.1@73.882,34.925 ; R2.1@74.93,24.892 v1(76.962,24.892)
  Top Layer w1.17: v1(60.96,15.494) 60.979,15.475 62.831,15.475 R3.2 ; v1(61.976,6.731) 61.976,6.758 62.563,7.345 C8.1
  other v1: 75.946,8.382 74.168,10.033 75.946,10.033
  other v3: 68.58,28.194 67.31,29.464 68.58,29.464
NetAUXM_1: AUXM.1 DRV.2 | length 25.9
  Top Layer w0.4: DRV.2 72.237,27.204 73.025,26.416 73.025,24.257 74.168,23.114 85.852,23.114 87.884,25.146 87.884,27.392 AUXM.1
NetAUXM_2: AUXM.2 DRV.4 | length 15.6
  Top Layer w0.4: DRV.4 75.89,28.504 77.47,26.924 AUXM.2
NetBOOST_1: BOOST.1 R3.1 R4.2 | length 0.1
  Top Layer w0.254: R3.1@62.865,11.938 R3.1@62.918,11.991
NetBOOST_2: BOOST.2 DRV.1 ENC.1 MCU.27 | length 82.7
  Top Layer w0.254: BOOST.2@65.532,9.906 60.071,9.906 58.801,11.176 MCU.27 58.801,14.224 58.801,16.637 68.834,26.67 DRV.1@70.866,26.67
  Bottom Layer w0.254: ENC.1@8.157,6.633 12.7,11.176 MCU.27
NetBOOST_3: BOOST.3 C8.2 L1.2 MCU.1 | length 38
  Top Layer w0.3: MCU.1 MCU.1@35.445,18.796
  Top Layer w0.35: C8.2 64.35,8.509 C8.2@64.516,8.509
  Top Layer w1.17: MCU.1@35.445,18.796 49.034,5.207 L1.2 C8.2@64.262,8.43
NetBOOST_5: BOOST.5 L1.1 | length 5.2
  Top Layer w0.3: 66.548,9.525 66.937,9.914 BOOST.5
  Top Layer w0.7: L1.1@66.548,5.207 66.548,9.525
NetBOOST_6: BOOST.6 C1.2 C2.1 C3.2 C4.2 C9.2 C10.2 DAMP.1 DAMP.6 DRV.12 LEDA.1 R4.1 SVOB.1 SVOP.1 SVOS.1 | length 17.3
  Top Layer w0.254: C3.2@13.668,34.798 C3.2 C3.2@13.822,34.74 ; C4.2@15.621,34.798 C4.2@15.742,34.677 ; DAMP.6@17.411,34.677 DAMP.6 ; DAMP.1 23.179,33.315 23.474,33.02 v2(23.749,33.02)
  Top Layer w0.3: C2.1@62.23,27.305 C2.1 ; C1.2 63.491,28.713 63.933,29.154 DRV.12
  Top Layer w0.34: v2(11.557,34.798) C3.2@13.668,34.798 ; C3.2@13.822,34.74 C4.2 ; C4.2@15.742,34.677 DAMP.6@17.411,34.677
  Top Layer w0.4: v1(59.69,27.305) C2.1@62.23,27.305 ; C2.1 C1.2 ; R4.1@64.899,15.441 R4.1 ; C9.2@71.882,11.176 73.152,11.176 73.66,11.684
  Bottom Layer w0.3: v1@59.659,27.305 v1(59.69,27.305)
  other v1: 75.946,12.319 68.072,14.986 70.485,14.986 72.898,14.986
NetC5_1: C5.1 MCU.5 | length 12.5
  Top Layer w0.254: C5.1 v2(27.432,34.544)
  Bottom Layer w0.254: v2(27.432,34.544) 33.02,28.956 MCU.5
NetC5_2: C5.2 DAMP.3 | length 1.9
  Top Layer w0.254: DAMP.3 C5.2@23.811,34.615
NetC6_1: C6.1 FB2.2 SPKR.1 | length 17.1
  Top Layer w0.254: C6.1@17.526,37.084 17.742,37.084
  Top Layer w0.3: 17.742,37.084 18.823,38.165 FB2.2
  Top Layer w0.34: SPKR.1@5.969,32.549 11.585,38.165 FB2.2
NetC7_1: C7.1 FB1.2 SPKR.2 | length 18.7
  Top Layer w0.254: FB1.2@20.555,38.438 20.555,38.338 20.728,38.165 FB1.2 ; 22.007,37.086 22.223,37.086 C7.1
  Top Layer w0.3: FB1.2@20.928,38.165 22.007,37.086
  Top Layer w0.34: SPKR.2@5.969,35.049 10.036,39.116 19.877,39.116 FB1.2@20.555,38.438
NetDAMP_5: DAMP.5 FB2.1 | length 2.4
  Top Layer w0.254: DAMP.5 17.961,35.265 DAMP.5@18.059,35.363 ; FB2.1@18.761,36.703 FB2.1@18.923,36.703
  Top Layer w0.34: DAMP.5@18.059,35.363 18.059,36.001 FB2.1@18.761,36.703
NetDAMP_8: DAMP.8 FB1.1 | length 5.3
  Top Layer w0.254: DAMP.8 DAMP.8@17.529,33.371
  Top Layer w0.34: DAMP.8@17.529,33.371 18.385,33.371 20.828,35.814 FB1.1@20.828,36.703
NetDRV_3: DRV.3 R2.2 | length 4.3
  Top Layer w0.3: DRV.3 74.286,27.854 R2.2
NetDRV_5: DRV.5 STRM.2 | length 17.9
  Top Layer w0.4: DRV.5 75.001,29.154 82.042,36.195 STRM.2
NetDRV_6: DRV.6 R1.2 | length 5.3
  Top Layer w0.3: DRV.6 72.984,29.804 73.914,30.734 R1.2
NetDRV_7: DRV.7 STRM.1 | length 19.6
  Top Layer w0.4: DRV.7 72.025,30.454 72.644,31.073 72.644,33.147 73.279,33.782 74.803,33.782 79.716,38.695 STRM.1
NetDRV_9: DRV.9 MCU.21 | length 11.7
  Top Layer w0.254: MCU.21 61.087,31.75 63.246,31.75 63.881,31.115 DRV.9@65.024,31.115
NetDRV_10: DRV.10 MCU.20 | length 17.4
  Top Layer w0.254: MCU.20 56.007,28.956 60.96,33.909 65.913,33.909 66.929,32.893 66.929,31.496 66.9,31.496 65.902,30.498 65.051,30.498 DRV.10
NetDRV_15: DRV.15 MCU.10 | length 39.9
  Top Layer w0.254: MCU.10 35.306,41.783 35.433,41.783 36.703,41.783 53.34,25.146 56.642,25.146 57.912,23.876 62.992,23.876 63.99,24.874 63.99,26.906 64.262,27.178 DRV.15@65.024,27.178
NetDRV_16: DRV.16 MCU.9 | length 39.3
  Top Layer w0.254: MCU.9 35.538,39.011 36.808,39.011 53.213,22.606 63.119,22.606 65.007,24.494 DRV.16
NetENC_2: ENC.2 MCU.24 | length 51.6
  Bottom Layer w0.254: ENC.2@8.128,9.144 11.67,12.686 33.641,12.686 39.751,18.796 MCU.24
NetENC_3: ENC.3 MCU.23 | length 51.7
  Bottom Layer w0.254: ENC.3@8.064,11.747 11.543,15.226 34.657,15.226 40.767,21.336 MCU.23
NetLEDA_2: LEDA.2 MCU.7 | length 33.9
  Top Layer w0.254: LEDA.2@5.969,23.241 24.638,23.241 MCU.7
NetMCU_2: MCU.2 SW.1 | length 21
  Top Layer w0.254: SW.1@27.685,3.811 31.623,7.75 31.623,17.78 MCU.2@35.433,21.59
NetMCU_6: MCU.6 SVOB.2 | length 39
  Bottom Layer w0.254: MCU.6 47.289,43.352 47.289,48.9 SVOB.2
NetMCU_13: MCU.13 SVOP.2 | length 21.2
  Top Layer w0.254: MCU.13 57.19,46.736 SVOP.2
NetMCU_19: MCU.19 SVOS.2 | length 35.7
  Bottom Layer w0.254: MCU.19@55.88,31.496 62.147,31.496 75.863,17.78 SVOS.2@85.852,17.78
pads on no net: DAMP.2 DRV.8 MCU.3 MCU.4 MCU.8 MCU.11 MCU.12 MCU.14 MCU.15 MCU.16 MCU.17 MCU.18 MCU.22 MCU.26 MCU.28 PROP.1

## Polygon pours and split planes (outlines as drawn)
NetBOOST_6 on Top Layer "NONET_L02_P-001" (solid, pour order 2): 73.279,16.129 76.835,12.573 76.835,11.43 73.787,11.43 72.771,10.414 72.771,10.287 67.056,10.287 67.056,13.589 65.786,14.859 64.262,14.859 64.262,16.129 67.945,16.129
GND on Top Layer "NONET_L02_P-001" (solid, pour order 4): 67.056,9.525 67.056,7.874 69.215,5.715 76.835,5.715 76.835,10.922 73.787,10.922 72.39,9.525 71.374,9.525
NetBOOST_3 on Top Layer "NONET_L02_P-001" (solid, pour order 3): 65.786,9.525 63.627,9.525 63.627,7.747 65.278,7.747 65.786,8.255
NetBOOST_1 on Top Layer "NONET_L02_P-001" (solid, pour order 1): 65.913,10.287 65.913,12.7 62.103,12.7 62.103,10.287
NetBOOST_6 on PWR Plane (split plane): 88.795,66.594 89.033,66.566 89.267,66.52 89.498,66.455 89.722,66.372 89.94,66.272 90.148,66.155 90.347,66.022 90.535,65.874 90.711,65.711 90.874,65.535 91.022,65.347 91.155,65.148 91.272,64.94 91.372,64.722 91.455,64.498 91.52,64.267 91.566,64.033 91.594,63.795 91.603,63.572 91.602,63.556 91.602,3.556 91.603,3.54 91.594,3.317 91.566,3.079 91.52,2.845 91.455,2.614 91.372,2.39 91.272,2.172 91.155,1.964 91.022,1.765 90.874,1.577 90.711,1.401 90.535,1.238 90.347,1.09 90.148,0.957 89.94,0.84 89.722,0.74 89.498,0.657 89.267,0.592 89.033,0.546 88.795,0.518 88.572,0.509 88.556,0.51 3.556,0.51 3.54,0.509 3.317,0.518 3.079,0.546 2.845,0.592 2.614,0.657 2.39,0.74 2.172,0.84 1.964,0.957 1.765,1.09 1.577,1.238 1.401,1.401 1.238,1.577 1.09,1.765 0.957,1.964 0.84,2.172 0.74,2.39 0.657,2.614 0.592,2.845 0.546,3.079 0.518,3.317 0.509,3.54 0.51,3.556 0.51,63.556 0.509,63.572 0.518,63.795 0.546,64.033 0.592,64.267 0.657,64.498 0.74,64.722 0.84,64.94 0.957,65.148 1.09,65.347 1.238,65.535 1.401,65.711 1.577,65.874 1.765,66.022 1.964,66.155 2.172,66.272 2.39,66.372 2.614,66.455 2.844,66.52 3.079,66.566 3.317,66.594 3.54,66.603 3.556,66.602 88.556,66.602 88.572,66.603
GND on GND Plane (split plane): 88.795,66.594 89.033,66.566 89.267,66.52 89.498,66.455 89.722,66.372 89.94,66.272 90.148,66.155 90.347,66.022 90.535,65.874 90.711,65.711 90.874,65.535 91.022,65.347 91.155,65.148 91.272,64.94 91.372,64.722 91.455,64.498 91.52,64.267 91.566,64.033 91.594,63.795 91.603,63.572 91.602,63.556 91.602,3.556 91.603,3.54 91.594,3.317 91.566,3.079 91.52,2.845 91.455,2.614 91.372,2.39 91.272,2.172 91.155,1.964 91.022,1.765 90.874,1.577 90.711,1.401 90.535,1.238 90.347,1.09 90.148,0.957 89.94,0.84 89.722,0.74 89.498,0.657 89.267,0.592 89.033,0.546 88.795,0.518 88.572,0.509 88.556,0.51 3.556,0.51 3.54,0.509 3.317,0.518 3.079,0.546 2.845,0.592 2.614,0.657 2.39,0.74 2.172,0.84 1.964,0.957 1.765,1.09 1.577,1.238 1.401,1.401 1.238,1.577 1.09,1.765 0.957,1.964 0.84,2.172 0.74,2.39 0.657,2.614 0.592,2.845 0.546,3.079 0.518,3.317 0.509,3.54 0.51,3.556 0.51,63.556 0.509,63.572 0.518,63.795 0.546,64.033 0.592,64.267 0.657,64.498 0.74,64.722 0.84,64.94 0.957,65.148 1.09,65.347 1.238,65.535 1.401,65.711 1.577,65.874 1.765,66.022 1.964,66.155 2.172,66.272 2.39,66.372 2.614,66.455 2.844,66.52 3.079,66.566 3.317,66.594 3.54,66.603 3.556,66.602 88.556,66.602 88.572,66.603

## Silkscreen, mask and mechanical layers (free items; w line width, h text height)
Top Overlay:
  drawing of 28 lines, arcs and shapes, not listed
  text "McMaster Chem-E Car 25-26 / MAC to the Future V.88" at 11.684,59.817 h1.52
Bottom Overlay:
  text "SS, EG, / AA, TN, CC, / VU, SR, YV" at 29.337,49.911 h1.52
  text "WayWayWay" at 21.463,2.159 h1.52
Mechanical 13:
  the board outline again, w0.254